# Altium PCB 3102_pcb.PcbDoc
Units mil, origin at the board's own origin, x right, y up, seen from the top; angles counter-clockwise.
Board outline 5000 x 3500 mil, 2 copper layers (Top Layer, Bottom Layer); 43 components, 50 nets, 177 pads, 34 vias.
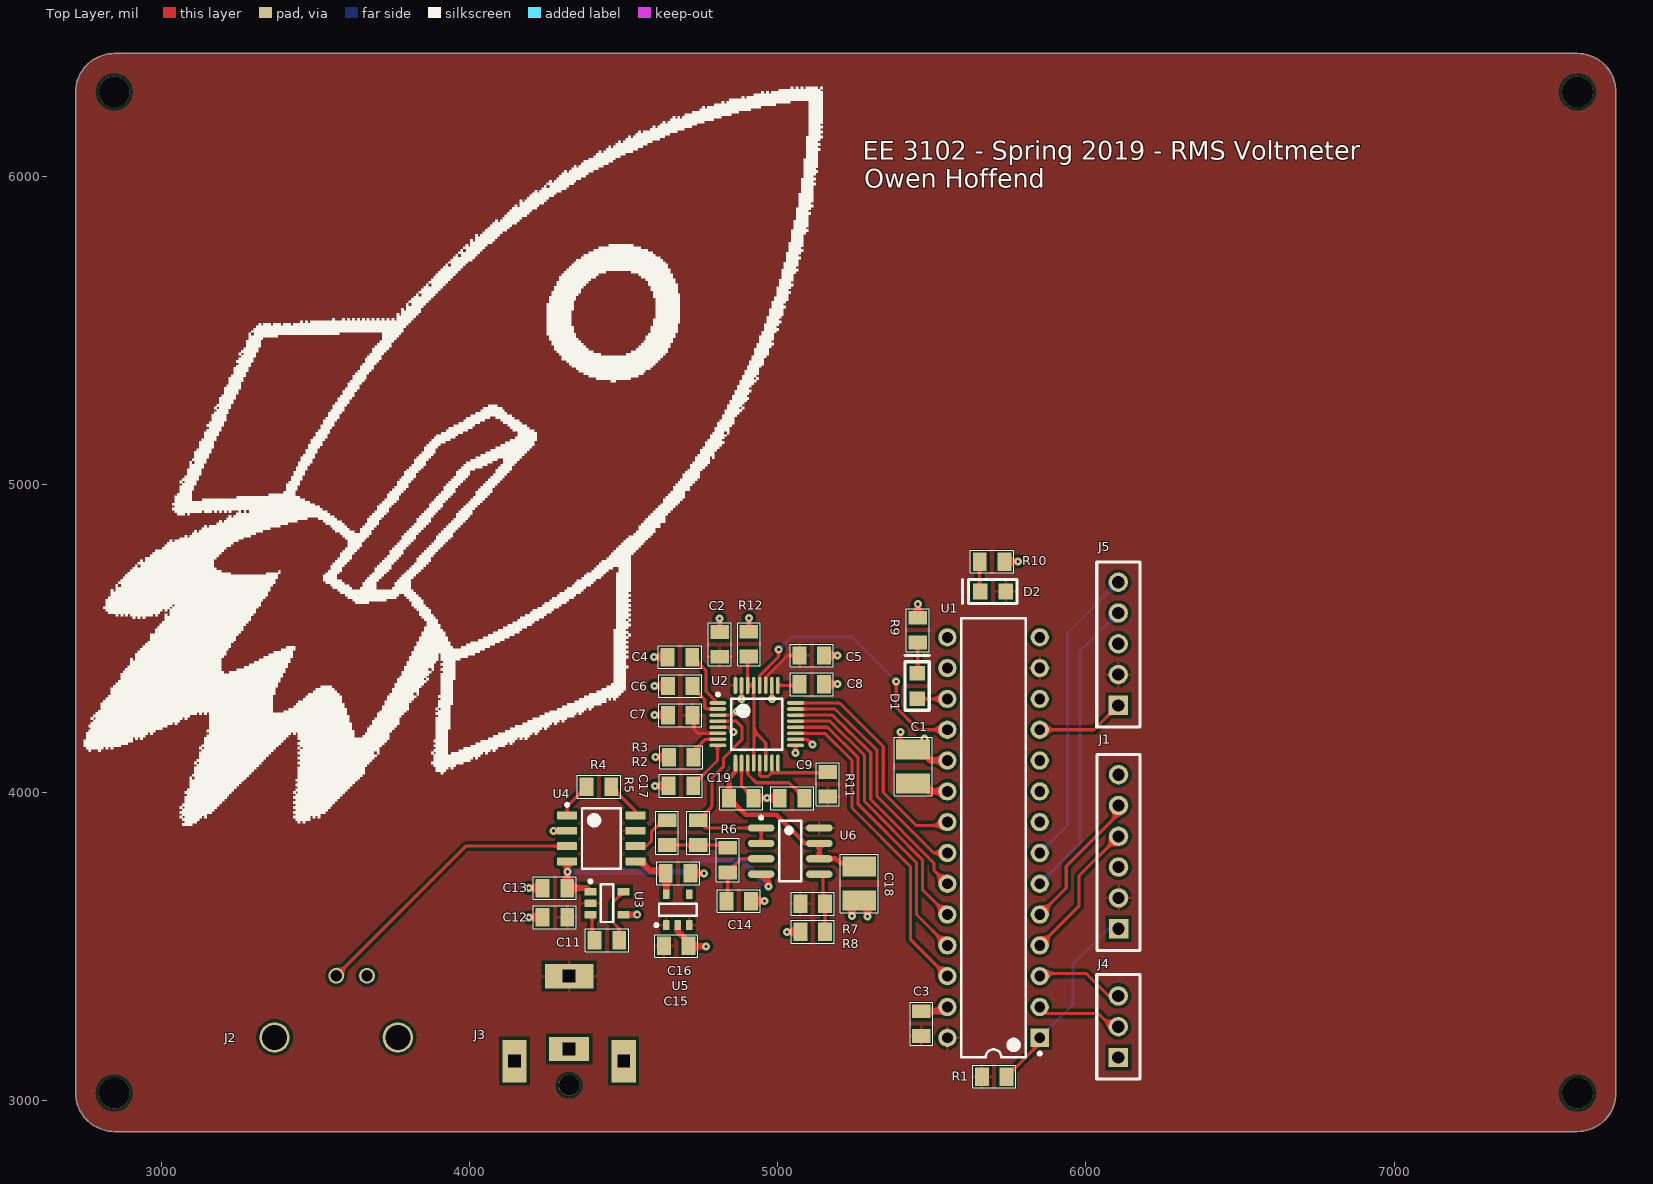
[diagram p0: Top Layer view]
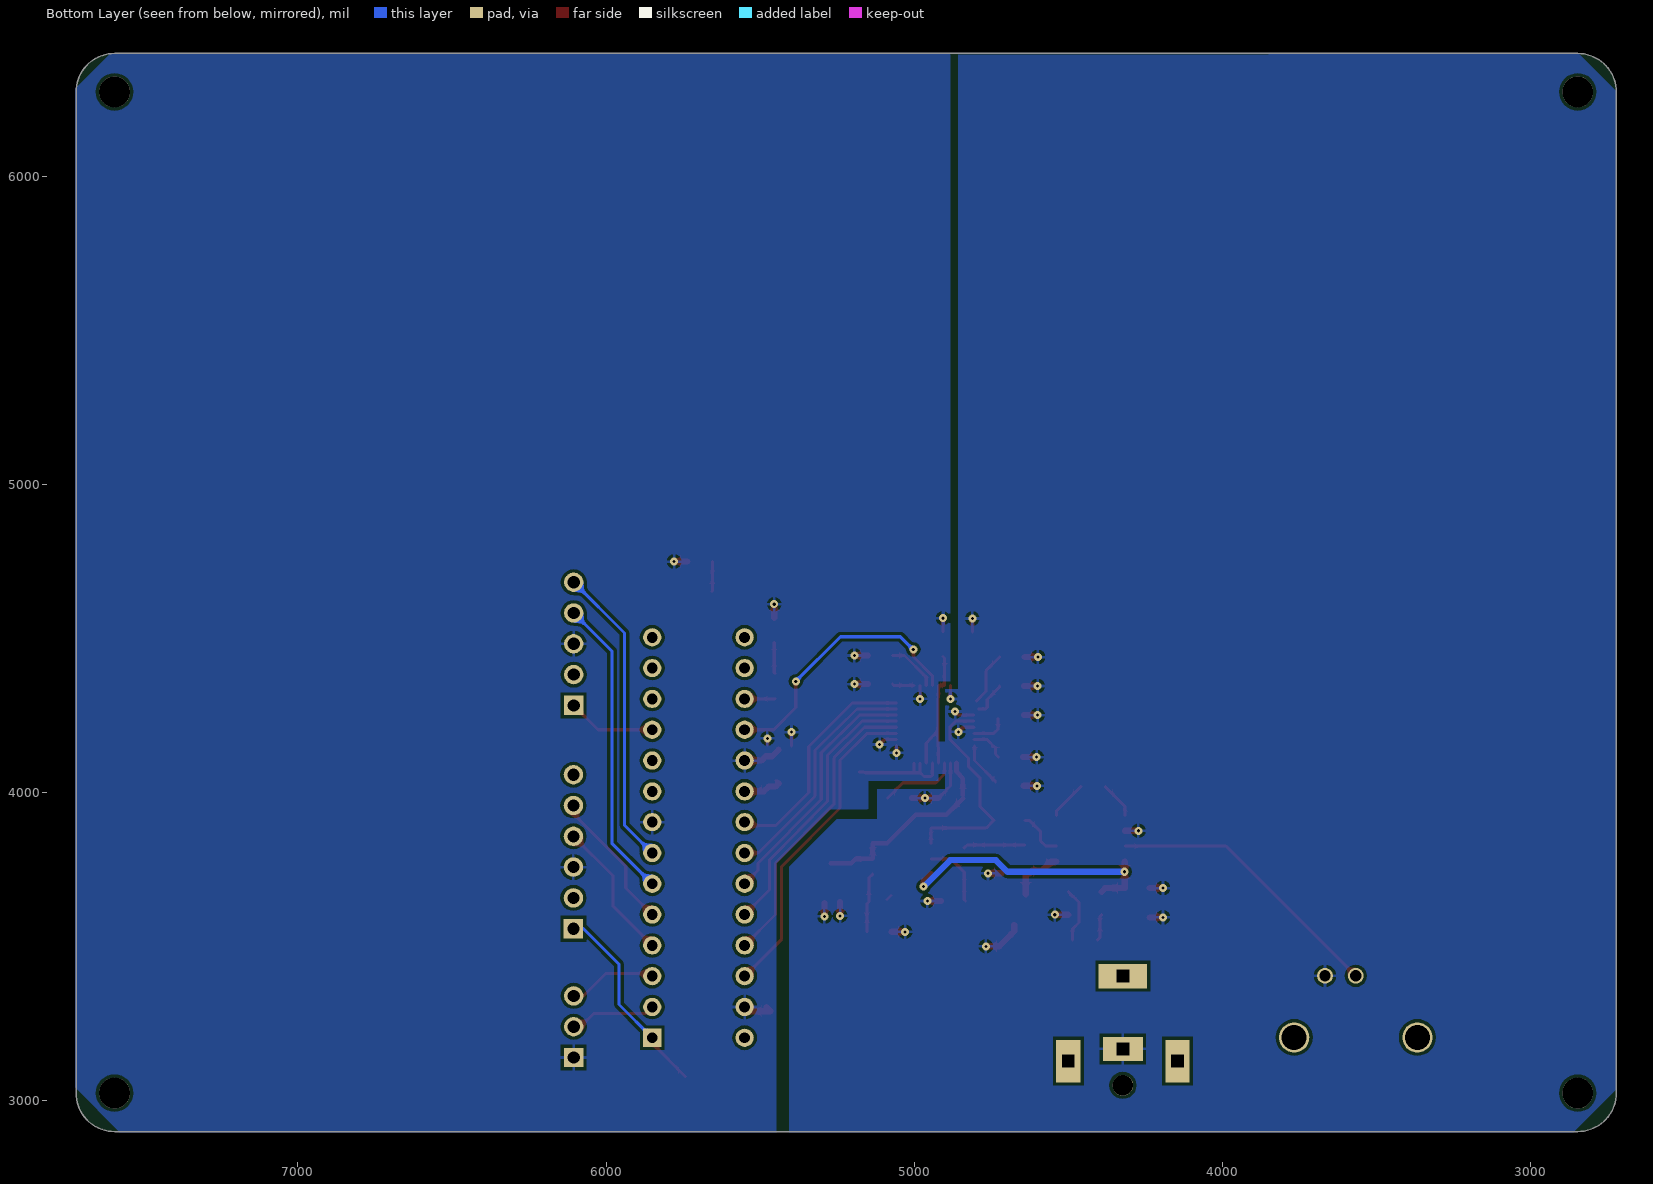
[diagram p1: Bottom Layer view, seen from below]
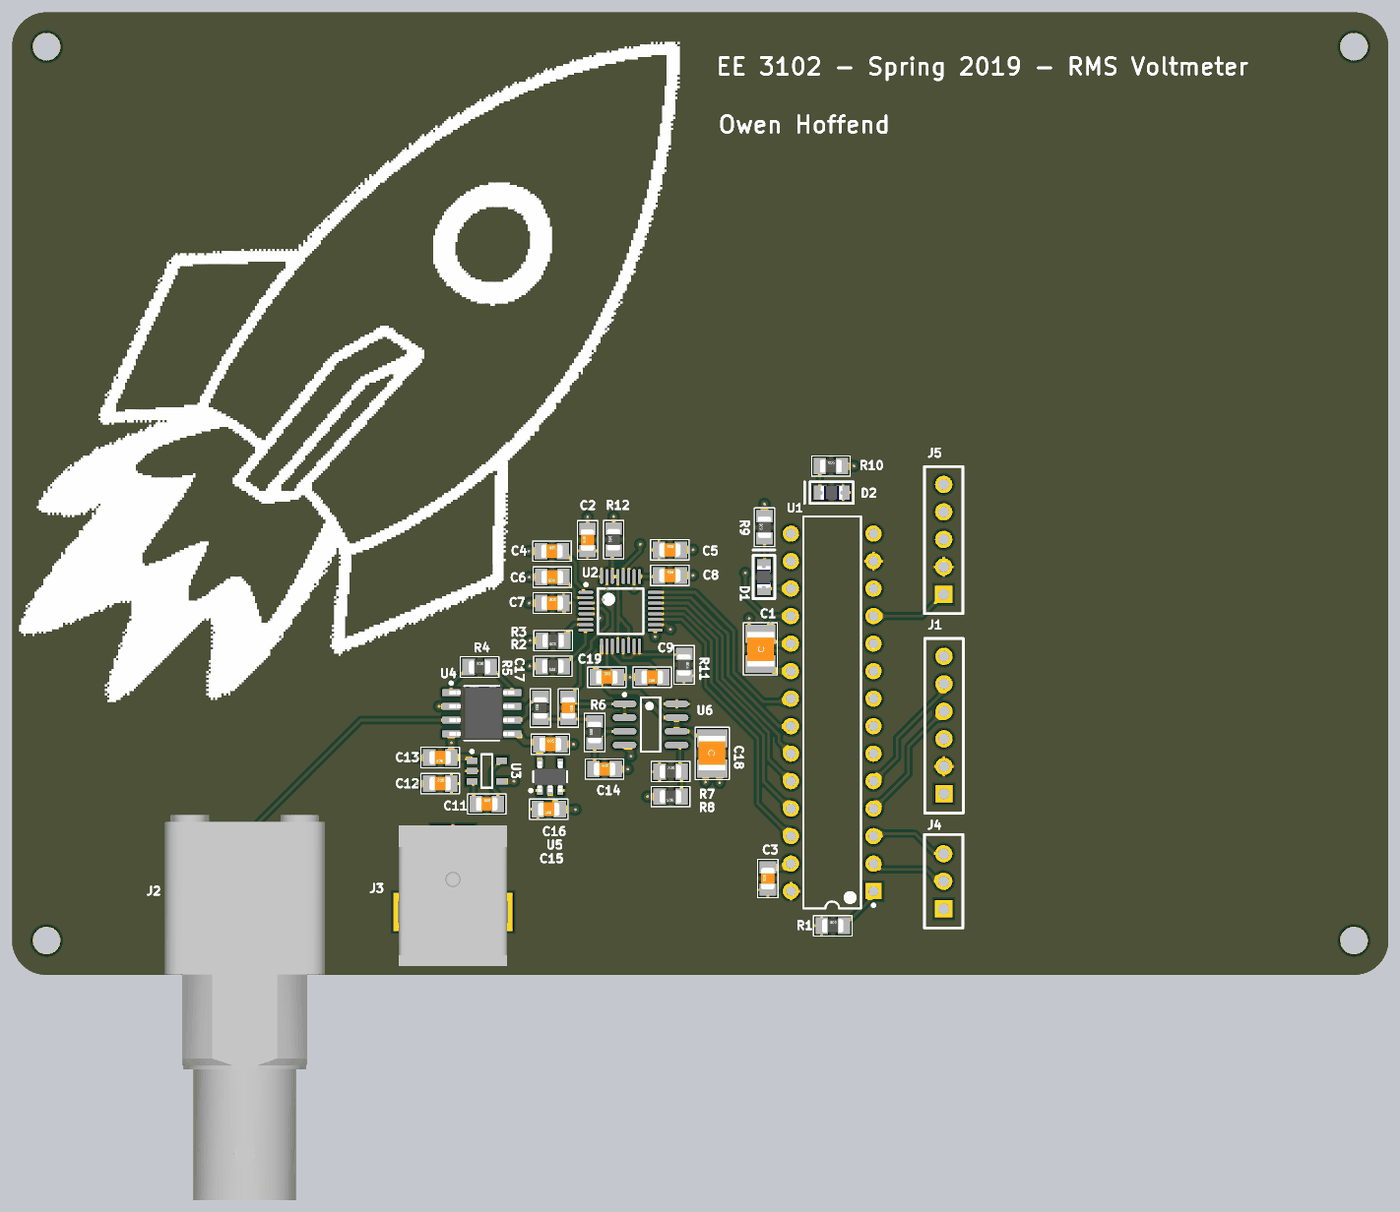
[diagram p2: 3D render of the assembled board from above, using the file's embedded part models]

## Layer stack, top to bottom
Top Solder: solder mask 0.4, Solder Resist, Dk 3.5
Top Layer: signal copper 1.4
Dielectric 1: dielectric 12.6, FR-4, Dk 4.8
Bottom Layer: signal copper 1.4
Bottom Solder: solder mask 0.4, Solder Resist, Dk 3.5

## Board outline
2845.5,2898.5 cw(c2845.5,3023.5) 2720.5,3023.5 2720.5,6273.5 cw(c2845.5,6273.5) 2845.5,6398.5 7595.5,6398.5 cw(c7595.5,6273.5) 7720.5,6273.5 7720.5,3023.5 cw(c7595.5,3023.5) 7595.5,2898.5

## Design rules (kind name [scope] priority, off if disabled: settings)
Clearance [All] p1: gap=10 ignorepadtopadclearanceinfootprint=FALSE except(0: SMDPad-Hole THPad-Hole Via-Hole Fill-Hole Poly-Hole Region-Hole Text-Hole; 5: Arc-Hole Track-Hole)
PolygonConnect [All] p1: connectstyle=Relief reliefconductorwidth=10 reliefentries=4 polygonreliefangle="90 Angle" airgapwidth=10
RoutingVias [All] p1: holewidth=28 width=50 viastyle="Through Hole" minholewidth=28 minwidth=50 maxholewidth=28 maxwidth=50
SilkToSolderMaskClearance [IsPad] p1: minsilkscreentomaskgap=5 clearancetoexposedcopper=TRUE
SolderMaskExpansion [All] p1: expansion=4
Width [All] p1: maxlimit=10 minlimit=10 preferedwidth=10
29 further rules are at their usual default settings.

## Components (designator, comment, footprint, x,y, rotation, side; value= is the part's Value field where it differs from the comment)
C1 "C_1210_10uF" 1210_Capacitor 5439,4084 r90 top value=10uF
C2 "CAP 0.1uF 50V X7R" 0805_Capacitor 4811,4480 r90 top value=0.1uF
C3 "CAP 0.1uF 50V X7R" 0805_Capacitor 5466,3249 r90 top value=0.1uF
C4 "CAP 1uF 16V X7R" 0805_Capacitor 4682,4439 r0 top value=1uF
C5 "CAP 1uF 16V X7R" 0805_Capacitor 5110,4444 r0 top value=1uF
C6 "CAP 1uF 16V X7R" 0805_Capacitor 4683,4345 r180 top value=1uF
C7 "CAP 1uF 16V X7R" 0805_Capacitor 4683,4250.47 r0 top value=1uF
C8 "CAP 1uF 16V X7R" 0805_Capacitor 5110,4351 r0 top value=1uF
C9 "CAP 1uF 16V X7R" 0805_Capacitor 5046,3981 r180 top value=1uF
C11 "CAP 1uF 16V X7R" 0805_Capacitor 4445.12,3519.83 r0 top value=1uF
C12 "CAP 1uF 16V X7R" 0805_Capacitor 4275.98,3594 r0 top value=1uF
C13 "CAP 1uF 16V X7R" 0805_Capacitor 4275.98,3689 r180 top value=1uF
C14 "CAP 1000pF 50V X7R" 0805_Capacitor 4873,3647 r0 top value=1000pF
C15 "CAP 1uF 16V X7R" 0805_Capacitor 4670,3501 r180 top value=1uF
C16 "CAP 1uF 16V X7R" 0805_Capacitor 4676,3737 r0 top value=1uF
C17 "CAP 1000pF 50V X7R" 0805_Capacitor 4741,3869 r270 top value=1000pF
C18 "C_1210_10uF" 1210_Capacitor 5264,3704 r270 top value=10uF
C19 "CAP 0.1uF 50V X7R" 0805_Capacitor 4881,3981 r0 top value=0.1uF
D1 "D_LED_0805_BLUE" 0805_BLUE 5452,4345 r270 top value=BLUE
D2 "D_LED_0805_BLUE" 0805_BLUE 5698,4652 r0 top value=BLUE
J1 "PROG_HEADER" PROG_HEADER 6106,3557 r90 top
J2 "BNC_CONN" BNC_Connector 3366,3204 r0 top
J3 "PWR_CONN" PJ-063AH 4499.33,3403.02 r180 top
J4 "UART_CONN" UART_HEADER 6105,3139 r90 top
J5 "LCD_HEADER" "LCD Header" 6105,4282 r90 top
R1 "R_0805_10K_1%" 0805_Resistor 5702,3077 r0 top value=10K
R2 "R_0805_10K_1%" 0805_Resistor 4685,4021 r180 top value=10K
R3 "RES SMD 60.4K OHM 0.1% 1/8W 0805" 0805_Resistor 4686,4114 r180 top value=60.4k
R4 "RES SMD 300 OHM 0.5% 1/10W 0805" 0805_Resistor 4419,4018 r0 top value=300
R5 "RES SMD 16K OHM 0.5% 1/10W 0805" 0805_Resistor 4640,3869 r90 top value=16k
R6 "RES SMD 16K OHM 0.5% 1/10W 0805" 0805_Resistor 4837,3780 r90 top value=16k
R7 "RES SMD 3.16K OHM 1% 1/8W 0805" 0805_Resistor 5113,3638 r0 top value=3.16K
R8 "R_0805_10K_1%" 0805_Resistor 5113,3547 r180 top value=10K
R9 "R_0805_1K_1%" 0805_Resistor 5454,4526.49 r90 top value=1K
R10 "R_0805_1K_1%" 0805_Resistor 5695,4749 r0 top value=1K
R11 "R_0805_100K_1%" 0805_Resistor 5162,4026 r270 top value=100K
R12 "R_0805_100K_1%" 0805_Resistor 4906,4481 r90 top value=100K
U1 "PIC24FJ64GA002-E/SP" SPDIP300-SP28 5700,3853 r180 top
U2 "ADS127L01" TSQFP50P700X700X105-32N 4931,4221 r0 top
U3 "TPS60400DBVR" TPS60400DBVR 4445.12,3639.83 r0 top
U4 "INA128U" D0008A_M 4427,3850 r0 top
U5 "LP5907MFX-3.3/NOPB" DBV0005A_L 4675,3619 r90 top
U6 "MC33078" 8-SOIC 5040,3809 r0 top

## Footprints (in the part's own frame and the unit in brackets; to place one, negate y for a bottom-side part, rotate by r counter-clockwise, add the part's x,y. Pads: shape width x height; smd on the part's side, far side on the other; paste and mask are expansions set on the pad)
8-SOIC [mm]
  oval 2.2x0.6 smd: 1(-2.4,1.905) 2(-2.4,0.635) 3(-2.4,-0.635) 4(-2.4,-1.905) 5(2.4,-1.905) 6(2.4,-0.635) 7(2.4,0.635) 8(2.4,1.905)
  silkscreen extent -2.52,-2.5 0.9,2.88, body extent -2,-2.5 2,2.5, height 1.75
0805_BLUE [mm] "Chip Capacitor; Body 2.0 x 1.2 mm (LxW typ)"
  rect 1.2x1.3 smd: 1(-1.05,0) 2(1.05,0)
  silkscreen extent -2.5,-1 2,1, body extent -1.02,-0.64 0.99,0.61, height 0.79
0805_Capacitor [mil] "0805 Capacitor"
  rect 45x60 smd: 1(-40,0) 2(40,0)
  silkscreen extent -70,-37 70,37, body extent -39,-25 39,25, height 30
0805_Resistor [mil] "0805 Resistor"
  rect 45x60 smd: 1(-40,0) 2(40,0)
  silkscreen extent -70,-37 70,37, body extent -39,-25 39,25, height 31
1210_Capacitor [mil] "1210 Capacitor"
  rect 65x110 smd: 1(-55,0) 2(55,0)
  silkscreen extent -95,-62 95,62, body extent -84,-54 82,52, height 36
BNC_Connector [mm]
  round 1.3 hole 0.94: 1(5.08,5.08) 2(7.62,5.08)
  round 2.5 hole 2.06: SHIELD(0,0) SHIELD(10.16,0)
  body extent -2.31,-28.56 12.45,7, height 17.62
D0008A_M [mm] "SOIC, 8-Leads, Body 5x4mm, Pitch 1.27mm, IPC Low Density"
  rrect15% 1.65x0.65 smd: 1(-2.825,1.905) 2(-2.825,0.635) 3(-2.825,-0.635) 4(-2.825,-1.905) 5(2.825,-1.905) 6(2.825,-0.635) 7(2.825,0.635) 8(2.825,1.905)
  silkscreen extent -2.95,-2.5 1.6,2.9, body extent -3,-2.45 3,2.45, height 1.63
DBV0005A_L [mm] "SOT23, 5-Leads, Body 3.05x1.75mm, Pitch 0.95mm, IPC High Density"
  rrect18% 0.8x0.55 smd: 1(-1.275,0.95) 2(-1.275,0) 3(-1.275,-0.95) 4(1.275,-0.95) 5(1.275,0.95)
  silkscreen extent -1.4,-1.55 0.5,1.9, body extent -1.42,-1.46 1.42,1.46, height 1.08
"LCD Header" [mm]
  rect 1.6x1.6 hole 1: 1(0,0)
  round 1.6 hole 1: 2(2.54,0) 3(5.08,0) 4(7.62,0) 5(10.16,0)
  silkscreen extent -1.78,-1.78 11.81,1.78
PJ-063AH [mm] "DC Jack"
  rect 4x2 hole 1.02 square: 1(4.5,0)
  rect 3.3x2 hole 1.02 square: 2(4.5,6)
  round 1.7 hole 1.7: "MOUNT HOLE"(4.5,9)
  rect 2x3.5 hole 1.02 square: SHIELD(0,7) SHIELD(9,7)
  body extent -0.65,-1 9.65,12, height 9.5
PROG_HEADER [mm]
  rect 1.6x1.6 hole 1: 1(0,0)
  round 1.6 hole 1: 2(2.54,0) 3(5.08,0) 4(7.62,0) 5(10.16,0) 6(12.7,0)
  silkscreen extent -1.78,-1.78 14.35,1.78
SPDIP300-SP28 [mm] "DIP, 28-Pin, Row Spacing 7.62 mm, Pitch 2.54 mm"
  rect 1.5x1.5 hole 0.9: 1(-3.81,16.51)
  round 1.5 hole 0.9: 2(-3.81,13.97) 3(-3.81,11.43) 4(-3.81,8.89) 5(-3.81,6.35) 6(-3.81,3.81) 7(-3.81,1.27) 8(-3.81,-1.27) 9(-3.81,-3.81) 10(-3.81,-6.35) 11(-3.81,-8.89) 12(-3.81,-11.43) 13(-3.81,-13.97) 14(-3.81,-16.51) 15(3.81,-16.51) 16(3.81,-13.97) 17(3.81,-11.43) 18(3.81,-8.89) 19(3.81,-6.35) 20(3.81,-3.81) 21(3.81,-1.27) 22(3.81,1.27) 23(3.81,3.81) 24(3.81,6.35) 25(3.81,8.89) 26(3.81,11.43) 27(3.81,13.97) 28(3.81,16.51)
  silkscreen extent -3.94,-18.1 2.65,18.1, body extent -3.55,-18.1 3.55,18.1, height 5.33
TPS60400DBVR [mm] "SOT23, 5-Leads, Body 2.90x2.80mm, Pitch 0.95mm, IPC Medium Density"
  rect 1x0.6 smd: 1(-1.375,0.95) 2(-1.375,0) 3(-1.375,-0.95) 4(1.375,-0.95) 5(1.375,0.95)
  silkscreen extent -1.5,-1.55 0.5,1.92, body extent -0.88,-1.52 0.87,1.53, height 1.45
TSQFP50P700X700X105-32N [mm] "TSQFP, 32-Leads, Body 5.00x5.00mm, Pitch 0.50mm, IPC Medium Density"
  oval 1.4x0.3 smd: 1(-3.2,1.75) 2(-3.2,1.25) 3(-3.2,0.75) 4(-3.2,0.25) 5(-3.2,-0.25) 6(-3.2,-0.75) 7(-3.2,-1.25) 8(-3.2,-1.75) 17(3.2,-1.75) 18(3.2,-1.25) 19(3.2,-0.75) 20(3.2,-0.25) 21(3.2,0.25) 22(3.2,0.75) 23(3.2,1.25) 24(3.2,1.75)
  oval 0.3x1.4 smd: 9(-1.75,-3.2) 10(-1.25,-3.2) 11(-0.75,-3.2) 12(-0.25,-3.2) 13(0.25,-3.2) 14(0.75,-3.2) 15(1.25,-3.2) 16(1.75,-3.2) 25(1.75,3.2) 26(1.25,3.2) 27(0.75,3.2) 28(0.25,3.2) 29(-0.25,3.2) 30(-0.75,3.2) 31(-1.25,3.2) 32(-1.75,3.2)
  silkscreen extent -3.32,-2.1 2.1,2.57, body extent -2.5,-2.5 2.5,2.5, height 1.05
UART_HEADER [mm]
  rect 1.6x1.6 hole 1: 1(0,0)
  round 1.6 hole 1: 2(2.54,0) 3(5.08,0)
  silkscreen extent -1.78,-1.78 6.86,1.78

## Part data
C1 C18: "CAP CER 10UF 50V 10% X5R 1210", Manufacturer="Taiyo Yuden", Manufacturer PN=UMK325BJ106KM-T, Package=1210, Supplier Part Number 1=587-2247-1-ND, Supplier 1=Digi-Key, SVP Creator="Matt Rogge"
C2 C3 C19: library part C_0805_0.1uF_50V_10%, "CAP CERM 0.1uF 10% 50V 0805", Package==SelectedPackage, Supplier Part Number 1=1276-1003-1-ND, Temperature Coefficient=X7R, Voltage=50V, Supplier 1=Digi-Key, SVP Creator="Spencer Berglund"
C4 C5 C6 C7 C8 C9 C11 C12 C13 C15 C16: library part C_0805_1uF_16V_10%, "CAP CERM 1uF 10% 16V 0805", Package==SelectedPackage, Supplier Part Number 1=1276-6471-1-ND, Temperature Coefficient=X7R, Voltage=16V, Supplier 1=Digi-Key, SVP Creator="Spencer Berglund"
C14 C17: library part C_0805_1000pF_50V_10%, "CAP CERM 1000pF 10% 50V 0805", Package==SelectedPackage, Supplier Part Number 1=1276-1020-1-ND, Temperature Coefficient=X7R, Voltage=50V, Supplier 1=Digi-Key, SVP Creator="Spencer Berglund"
D1 D2: "LED 2X1.2MM 470NM BL WTR CLR SMD", Current=20mA, Forward Voltage=3.3, Manufacturer=Kingbright, Manufacturer PN=APT2012QBC/D, Package=0805, Supplier Part Number 1=754-1437-1-ND, Supplier=Digikey, Supplier 1=Digi-Key, Supplier PN=754-1437-1-ND, SVP Creator="Jonathan Nutzmann"
J1: "For Programming the PIC24"
J2: "Connector for the noise input signal", Supplier Part Number 1=WM5514-ND, Supplier 1=Digi-Key
J4: "Could be either a header or a USB Connector"
R1 R2 R8: "RES 10K OHM 1/8W 1% 0805 SMD", Package=0805_Resistor, Power Rating=0.125W, Supplier Part Number 1=311-10.0KCRCT-ND, Supplier 1=Digi-Key, SVP Creator="Spencer Berglund"
R3: library part R_0805_60.4K_1%, Supplier Part Number 1=P60.4KDACT-ND, Supplier 1=Digi-Key
R4: library part R_0805_300_0.5%, Supplier Part Number 1=RR12P300DDKR-ND, Supplier 1=Digi-Key
R5 R6: library part R_0805_16K_0.5%, Supplier Part Number 1=RR12P300DDKR-ND, Supplier 1=Digi-Key
R7: Supplier Part Number 1=P3.16KCDKR-ND, Supplier 1=Digi-Key
R9 R10: "RES 1K OHM 1/8W 1% 0805 SMD", Package=0805_Resistor, Power Rating=0.125W, Supplier Part Number 1=311-1.00KCRCT-ND, Supplier 1=Digi-Key, SVP Creator="Spencer Berglund"
R11 R12: "RES 100K OHM 1/8W 1% 0805 SMD", Package=0805_Resistor, Power Rating=0.125W, Supplier Part Number 1=311-100KCRCT-ND, Supplier 1=Digi-Key, SVP Creator="Spencer Berglund"
U1: library part CMP-0046-00005-1, "General Purpose 16-Bit Flash Microcontroller, 64KB Flash, 8KB SRAM, 28-Pin SPDIP, Extended Temperature", DatasheetVersion="revD, Feb-2010", PackageDescription="28-Lead Skinny Plastic Dual In-Line (SP) - 300 mil Body [SPDIP]", PackageReference=SPDIP300-SP28, PackageVersion="revBB, Aug-2009"
U2: "ADC", Supplier Part Number 1=296-44344-6-ND, Supplier 1=Digi-Key
U3: "IC REG SWTCHD CAP INV 60MA SOT23", Supplier Part Number 1=296-27004-6-ND, Supplier 1=Digi-Key
U4: library part CMP-0992-00017-2, "Precision, Low Power Instrumentation Amplifier, -40 to 85 degC, 8-pin SOIC (D8), Green (RoHS & no Sb/Br)", Input Bias Current (+/-)(Max)(nA)=5, Manufacturer="Texas Instruments", Quiescent Current (+/-)(Typ)(mA)=0.7, CMRR(Min)(dB)=120, Code_JEDEC=MS-012, ComponentLink1Description="Manufacturer URL", ComponentLink1URL=http://www.ti.com/, ComponentLink2Description=Datasheet, ComponentLink2URL=http://www.ti.com/general/docs/lit/getliterature.tsp?genericPartNumber=INA128&fileType=pdf, ComponentLink3Description="Package Specification", ComponentLink3URL=http://www.ti.com/litv/pdf/msoi002j, DatasheetVersion=SBOS051B, Eco-Plan="Green (RoHS & no Sb/Br)", Gain(V/V)="1 to 10000", Input Offset (+/-)(Max)(uV)=50, Input Offset Drift (+/-)(Max)(uV/Degrees Celsius)=0.5, Mounting Technology="Surface Mount", Noise at 1kHz(Typ)(nV/rt(Hz))=8, Non-Linearity (+/-)(Max)(%)=0.002, Number of Channels=1, PackageDescription="8-Pin Plastic Small Outline, Body 4.9 x 3.9 mm, Pitch 1.27 mm", PackageReference=D0008A, PackageVersion="4040047-3/M, 06/2011", PartNumber=INA128U, SubFamily="Dual Supply", Vs(Max)(V)=36, Vs(Min)(V)=4.5
U5: library part CMP-2000-07464-1, "Ultra-Low-Noise, Low-IQ LDO, 0.25 A, Fixed 3.3 V Output, 2.2 to 5.5 V Input, -40 to 125 degC, 5-Pin SOT-23 (DBV), Green (RoHS & no Sb/Br), Tape and Reel", Case\/Package=SOT-23, Dropout Voltage=250mV, Manufacturer="Texas Instruments", Max Input Voltage=5.5V, Max Operating Temperature=125degC, Max Output Current=250mA, Min Input Voltage=2.2V, Min Operating Temperature=-40degC, Nominal Output Voltage=3.3V, Output Voltage Accuracy=2%, Package Description="5-Pin Small Outline Transistor, Body 2.9 x 1.6 mm, Pitch 0.95 mm", Package Quantity=3000, Package Reference=DBV5, Package Version="4073253-4/N, 12/2014", Power Supply Rejection Ratio (PSRR)=82dB, Quiescent Current=425uA, Accuracy=2%, Contact Plating=Tin, Datasheet URL=http://www.ti.com/lit/ds/symlink/lp5907.pdf, Datasheet Version="Rev. L, 09/2016", Lead Free=LeadFree, Manufacturer URL=http://www.ti.com/, Mount=SurfaceMount, Mounting Technology=SurfaceMount, Number of Outputs=1, Number of Pins=5, Number of Regulators=1, Output Current=250mA, Output Voltage=3.3V, Package URL=http://www.ti.com/lit/ml/mpds018l/mpds018l.pdf, Packaging=TapeandReel, Polarity=Positive, Radiation Hardening=No, REACH SVHC=NoSVHC, RoHSCompliant=true

## Free pads (board coordinates)
  round 100 hole 100: MOUNTING_HOLE(2845.5,3023.5) MOUNTING_HOLE(2845.5,6273.5) MOUNTING_HOLE(7595.5,3023.5) MOUNTING_HOLE(7595.5,6273.5)

## Via types
v1: diameter 26, hole 10, Top Layer to Bottom Layer, tented top, 34 vias

## Nets (pads, with @x,y where several pads share a name; then routed paths per layer and width w, separated by ;. In a path a pad name is that pad's centre, name@x,y a point inside that pad or via, vN(x,y) a via of type N, cw(c..) or ccw(c..) an arc to the next point about the centre after c; other vN are vias at no path point)
1V5: C16.1 U4.5 U5.5 | length 182
  Top Layer w20: U4.5 4555,3775 4585,3745 4617,3745 4625,3737 C16.1 4637.6,3735.4 U5.5
"2V5 REF": R7.2 R8.1 U6.5 | length 194.7
  Top Layer w10: U6.5 5147,3721.49 5147,3644 R7.2 R8.1
3V3: C2.1 C3.1 C5.1 C7.2 C12.2 C15.2 D2.2 J1.2 J3.1 J5.2 R1.1 R7.1 R11.2 U1.13 U1.28 U2.6 U2.27 U2.32 U3.2 U4.7 U5.1 U5.3 U6.8 | length 301.9
  Top Layer w10: C7.2@4727,4240 4727,4205.31 4740.84,4191.47 U2.6 ; U2.27 4960.53,4373.34 5031.19,4444 C5.1 ; R7.1@5075,3665 R7.1@5088,3652
-3V3: C13.1 U3.1 U4.4 U6.4 | length 919.1
  Top Layer w20: U4.4 4315.98,3774.8 C13.1 4379.21,3689 U3.1 ; U6.4 4969,3710.51 v1(4969,3694)
  Bottom Layer w20: v1(4317,3742) 4697,3742 4735,3780 4883,3780 v1(4969,3694)
AINP: C17.1 U2.4 U6.1 U6.2 | length 713.1
  Top Layer w10: U2.4 4865.16,4230.84 4883,4213 4883,4170 4824,4111 4824,4084 4785.47,4045.47 4785.47,3953.47 C17.1 4766,3884 U6.1 U6.2
CAP1: C6.1 U2.2 | length 116.1
  Top Layer w10: C6.1 4723,4340.72 4762.46,4301.26 4762.46,4275.69 4767.15,4271 U2.2@4791,4271
CAP2: C9.1 U2.11 | length 252.5
  Top Layer w10: U2.11 4901.47,4059.53 4930,4031 5036,4031 C9.1
CAP3: C8.1 U2.25 | length 71.8
  Top Layer w10: U2.25 5065.98,4346.98 C8.1
CLK: U1.21 U2.24 | length 749.9
  Top Layer w10: U2.24 5200.46,4289.9 5342,4148.36 5342,3999 5449,3892 5539,3892 U1.21
CSn: U1.22 U2.23 | length 773
  Top Layer w10: U2.23 5185.14,4270.21 5321.65,4136.36 5321.65,3987.4 5506.06,3803 U1.22
DIN: U1.24 U2.21 | length 905.1
  Top Layer w10: U2.21 5168.84,4230.84 5280.96,4120.05 5280.96,3970.37 5468.84,3781.16 5468.84,3684.16 U1.24 U1.24@5542.5,3603
DOUT: U1.25 U2.20 | length 973.1
  Top Layer w10: U2.20 5160.68,4211.16 5260.61,4111.89 5260.61,3961.06 5450,3771 5450,3603 U1.25
DRDYn: U1.26 U2.19 | length 1048.7
  Top Layer w10: U2.19 5152.53,4191.47 5240.26,4103.74 5240.26,3948.74 5430,3759 5430,3523 U1.26
GND: C1.2 C2.2 C3.2 C4.1 C5.2 C6.2 C7.1 C8.2 C9.2 C12.1 C13.2 C14.2 C15.1 C16.2 C18.2 C19.2 J1.3 J2.2 J3.2 J4.1 J5.3 R2.2 R3.2 R8.2 R9.2 R10.2 R12.2 U1.8 U1.19 U1.27 U2.3 U2.5 U2.10 U2.17 U2.18 U2.26 U2.31 U3.4 U4.2 U5.2 | length 1828.6
  Top Layer w10: U3.4 U3.4@4501.85,3599.83 ; U2.5 4840.84,4211.16 v1(4856,4196) ; U2.3 4855.53,4250.53 v1(4867,4262) ; C2.2 v1(4811,4564) ; U2.10 4881.79,4020.21 C19.2 ; v1(4881.79,4302.98) U2.31 ; R12.2 v1(4906,4565) ; v1(4980.21,4302.98) U2.26 ; v1(5056.98,4127.79) U2.17 ; U2.18 5095.21,4171.79 v1(5112,4155) ; C1.2@5398,4151 v1(5398,4195) ; C1.2 C1.2@5440,4138 ; C1.2@5476,4153 v1(5476,4175)
  Top Layer w20: v1(4191.98,3594) C12.1 ; v1(4191.98,3689) C13.2 ; v1(4271.78,3875) U4.2 ; U3.4 v1(4543.25,3602.43) ; v1(4598,4439) C4.1 ; v1(4599,4250.47) C7.1 ; v1(4599,4345) C6.2 ; v1(4601,4021) R2.2 ; v1(4602,4114) R3.2 ; U5.2 4675,3548.78 4685.5,3538.28 4685.5,3537.5 4723,3500 v1(4767,3500) ; C16.2 v1(4760,3737) ; C14.2 v1(4957,3647) ; C19.2 v1(4965,3981) C9.2 ; v1(5029,3547) R8.2 ; C8.2 v1(5194,4351) ; C5.2 v1(5194,4444) ; v1(5240,3599) C18.2@5240,3643 ; v1(5291,3597) C18.2@5291,3641 ; C1.2@5440,4138 5461,4117 5481,4117 5495,4103 U1.19 ; R9.2 v1(5454,4610.49) ; C3.2@5479,3302 C3.2 5536,3289 U1.27@5549,3302 ; R10.2 v1(5779,4749)
I2C2_SCL: J5.5 U1.7 | length 984.6
  Bottom Layer w10: U1.7 5940,3893 5940,4517 J5.5
I2C2_SDA: J5.4 U1.6 | length 984.6
  Bottom Layer w10: U1.6 5980,3833 5980,4457 J5.4
NetC1_1: C1.1 U1.20 | length 134.5
  Top Layer w10: C1.1 C1.1@5448,4038
  Top Layer w20: C1.1 5449.5,4018.5 5472,4018.5 5487.5,4003 U1.20
NetC4_2: C4.2 U2.1 | length 174.5
  Top Layer w10: C4.2 4767,4394 4767,4327 4798,4296
NetC11_1: C11.1 U3.3 | length 88.5
  Top Layer w10: U3.3 4397,3596.41 4397,3527.95 C11.1
NetC11_2: C11.2 U3.5 | length 180.3
  Top Layer w10: C11.2 4485.12,3556.88 4464.57,3577.43 4464.57,3642.54 U3.5
NetC14_1: C14.1 R6.1 U6.3 | length 221.4
  Top Layer w10: C14.1 4837,3651 R6.1 4881,3784 U6.3
NetC17_2: C17.2 R5.1 R6.2 | length 200.7
  Top Layer w10: R5.1 C17.2 4828,3829 R6.2
NetD1_1: D1.1 R9.1 | length 101
  Top Layer w10: D1.1 5454,4388.34 R9.1
NetD1_2: D1.2 U1.17 | length 98.3
  Top Layer w10: D1.2 5452.66,4303 U1.17
NetD2_1: D2.1 R10.1 | length 97.7
  Top Layer w10: R10.1 5655,4653.66 D2.1
NetJ1_1: J1.1 R1.2 U1.1 | length 650.1
  Top Layer w10: R1.2 5850,3185 U1.1
  Bottom Layer w10: U1.1 5958,3311 5958,3442 6073,3557 J1.1
NetJ1_6: J1.6
NetJ2_1: J2.1 U4.3 | length 924.2
  Top Layer w10: J2.1 3987,3825 U4.3
NetR2_1: R2.1 U2.8 | length 145.2
  Top Layer w10: R2.1@4735,4034 4804,4103 U2.8@4804,4150.62
NetR3_1: R3.1 U2.7 | length 114.7
  Top Layer w10: R3.1 4735.79,4123.79 4735.79,4143.79 4763.79,4171.79 U2.7
NetR4_1: R4.1 U4.1 | length 119.2
  Top Layer w10: U4.1 4315.78,3954.78 R4.1
NetR4_2: R4.2 U4.8 | length 125.8
  Top Layer w10: R4.2 4538.22,3938.78 U4.8
NetR5_2: R5.2 U4.6 | length 154.1
  Top Layer w10: U4.6 4572,3825 4590,3843 4590,3873 4626,3909 R5.2
NetU1_9: U1.9
NetU1_10: U1.10
NetU1_12: U1.12
NetU1_14: U1.14
NetU1_15: U1.15
NetU1_16: U1.16
NetU5_4: U5.4
PGC: J1.5 U1.5 | length 460
  Top Layer w10: U1.5 5936,3689 5936,3760 6106,3930 J1.5
PGD: J1.4 U1.4 | length 460
  Top Layer w10: U1.4 5977,3630 5977,3728 J1.4
PU_HIGH: R11.1 U2.13 U2.15 U2.16 | length 348.5
  Top Layer w10: U2.13 4940.84,4055.16 4945,4051 4967.73,4051 4980.21,4063.48 ; U2.15 4980.21,4063.48 ; U2.16 4999.9,4064.58 5001,4063.48 ; R11.1@5178,4066 R11.1 5159.48,4063.48 5001,4063.48 ; 4980.21,4063.48 5001,4063.48
PU_LOW: R12.1 U2.12 U2.14 U2.29 U2.30 | length 488.2
  Top Layer w10: R12.1 4901.47,4436.47 U2.30 U2.29 4921.16,4307.28 4921.92,4306.54 4922.54,4200.46 ; U2.12 4922.54,4200.46 ; U2.14 4960.53,4159.47 4922.54,4200.46
REFP: C18.1 C19.1 U2.9 U6.6 U6.7 | length 658.4
  Top Layer w15: C19.1 4895,3927 4994.9,3927 5087.9,3834 U6.7 U6.6 5189,3784 5204,3769 C18.1@5270,3769 ; C19.1@4842,3991 4842,4046 4862.1,4066.1 U2.9
RESETn: U1.18 U2.28 | length 879.6
  Top Layer w10: U2.28 4940.84,4378.52 5002,4439.68 v1@5002,4463.42 ; v1(5384,4360) 5384,4275 5456,4203 U1.18
  Bottom Layer w10: v1@5003.98,4464 5044.98,4505 5239,4505 v1(5384,4360)
  other v1: 5002.58,4464
SCLK: U1.23 U2.22 | length 822
  Top Layer w10: U2.22 5176.99,4250.53 5301.3,4128.2 5301.3,3976.68 5507,3769 5507,3746 U1.23
U_RX: J4.3 U1.3 | length 289
  Top Layer w10: U1.3 5859,3412 6000,3412 6073,3339 J4.3
U_TX: J4.2 U1.2 | length 281.5
  Top Layer w10: U1.2 5871,3282 6040,3282 6083,3239 J4.2
XRST: J5.1 U1.11 | length 287.7
  Top Layer w10: U1.11 6026,4203 J5.1
pads on no net: "J3.MOUNT HOLE" J2.SHIELD J3.SHIELD

## Polygon pours and split planes (outlines as drawn)
GND on Bottom Layer "Bottom Layer-GND" (solid, pour order 11): 4883,6395.01 4886.99,6399 7608,6399 7723,6284 7723,3042 7578,2897 5447,2897 5447,3770 5272,3945 5153,3945 5151,3943 5148,3946 5148,4038 4922,4038 4921,4039 4921,4361 4883,4361
GND on Bottom Layer "Bottom Layer-GND 2" (solid, pour order 13): 4860.12,4164.49 4860.61,4164 4962,4164 4962,4059.63 4961.63,4060 4861,4060 4861,4164.39
GND on Bottom Layer "Bottom Layer-GND 1" (solid, pour order 9): 4857,6395 4857,4335 4898,4335 4898.5,4334.5 4898,4334 4898,4010 5120,4010 5120,3912 5250,3912 5250.5,3912.5 5405,3758 5406,3758 5406,2897 2860,2897 2719,3038 2719,6274 2843,6398
3V3 on Top Layer "Top Layer-No Net" (solid, pour order 1): 2845.5,2898.5 cw(c2845.5,3023.5) 2720.5,3023.5 2720.5,6273.5 cw(c2845.5,6273.5) 2845.5,6398.5 7595.5,6398.5 cw(c7595.5,6273.5) 7720.5,6273.5 7720.5,3023.5 cw(c7595.5,3023.5) 7595.5,2898.5

## Other copper
Bottom Layer:
  region: 4893,4625

## Silkscreen, mask and mechanical layers (free items; w line width, h text height)
Top Overlay:
  drawing of 2 lines, arcs and shapes, not listed
  text "EE 3102 - Spring 2019 - RMS Voltmeter" at 5275,6053 h60
  text "Owen Hoffend" at 5280,5962 h60
Mechanical 1:
  circle w10: c2845.5,3023.5 r45
  circle w10: c7595.5,3023.5 r45
  circle w10: c7595.5,6273.5 r45
  circle w10: c2845.5,6273.5 r45
  lines w10: 2720.5,3023.5 ccw(c2845.5,3023.5) 2845.5,2898.5 7595.5,2898.5 ccw(c7595.5,3023.5) 7720.5,3023.5 7720.5,6273.5 ccw(c7595.5,6273.5) 7595.5,6398.5 2845.5,6398.5 ccw(c2845.5,6273.5) 2720.5,6273.5 2720.5,3023.5